# Altium PCB 10GHz_Amp.PcbDoc
Units mil, origin at the board's own origin, x right, y up, seen from the top; angles counter-clockwise.
Board outline 1732.01 x 580 mil, 2 copper layers (Top Layer, Bottom Layer), stack 22.879 mil thick; 13 components, 8 nets, 35 pads, 2 vias.
Unrouted connection lines stored in the file: 25.
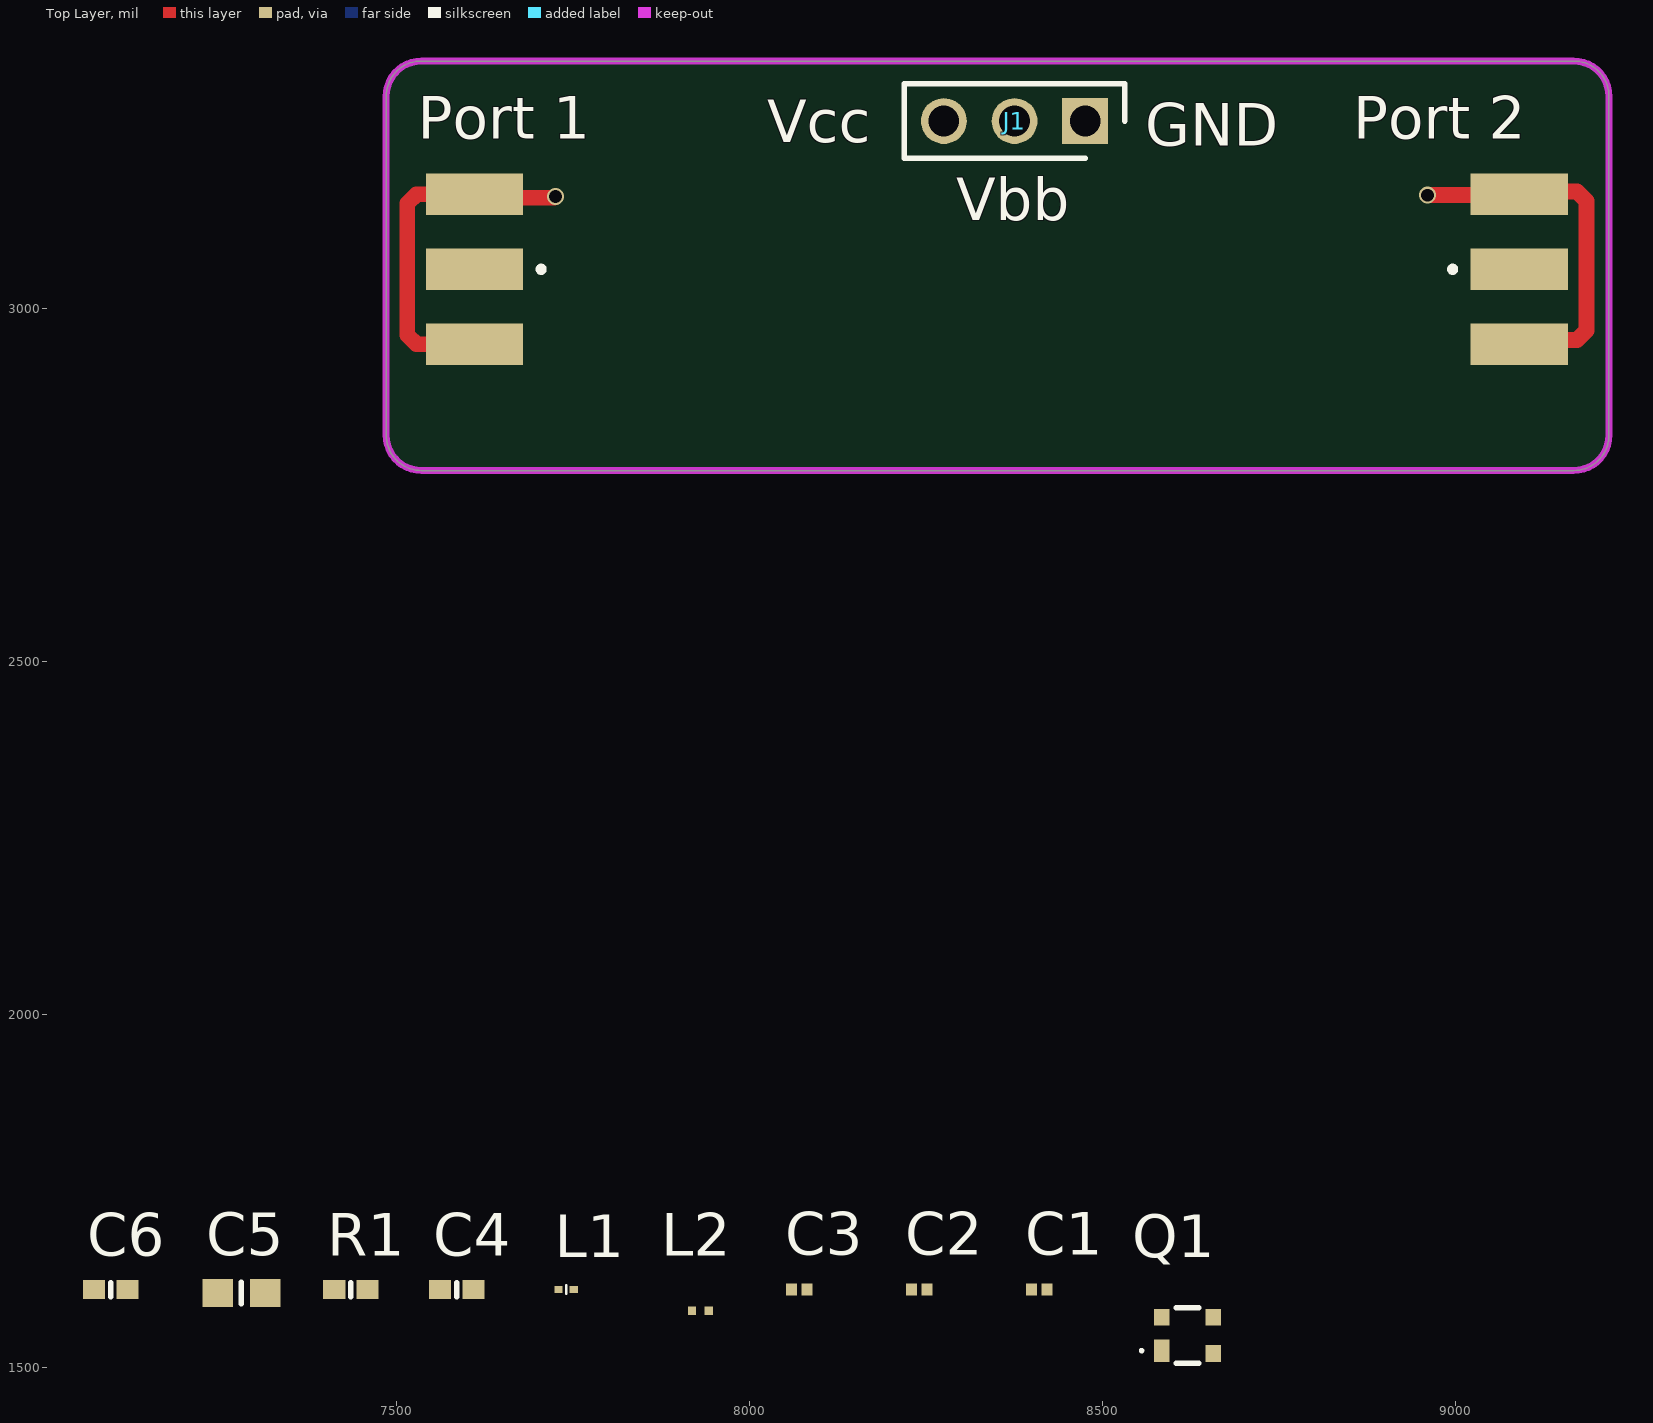
[diagram p0: Top Layer view]
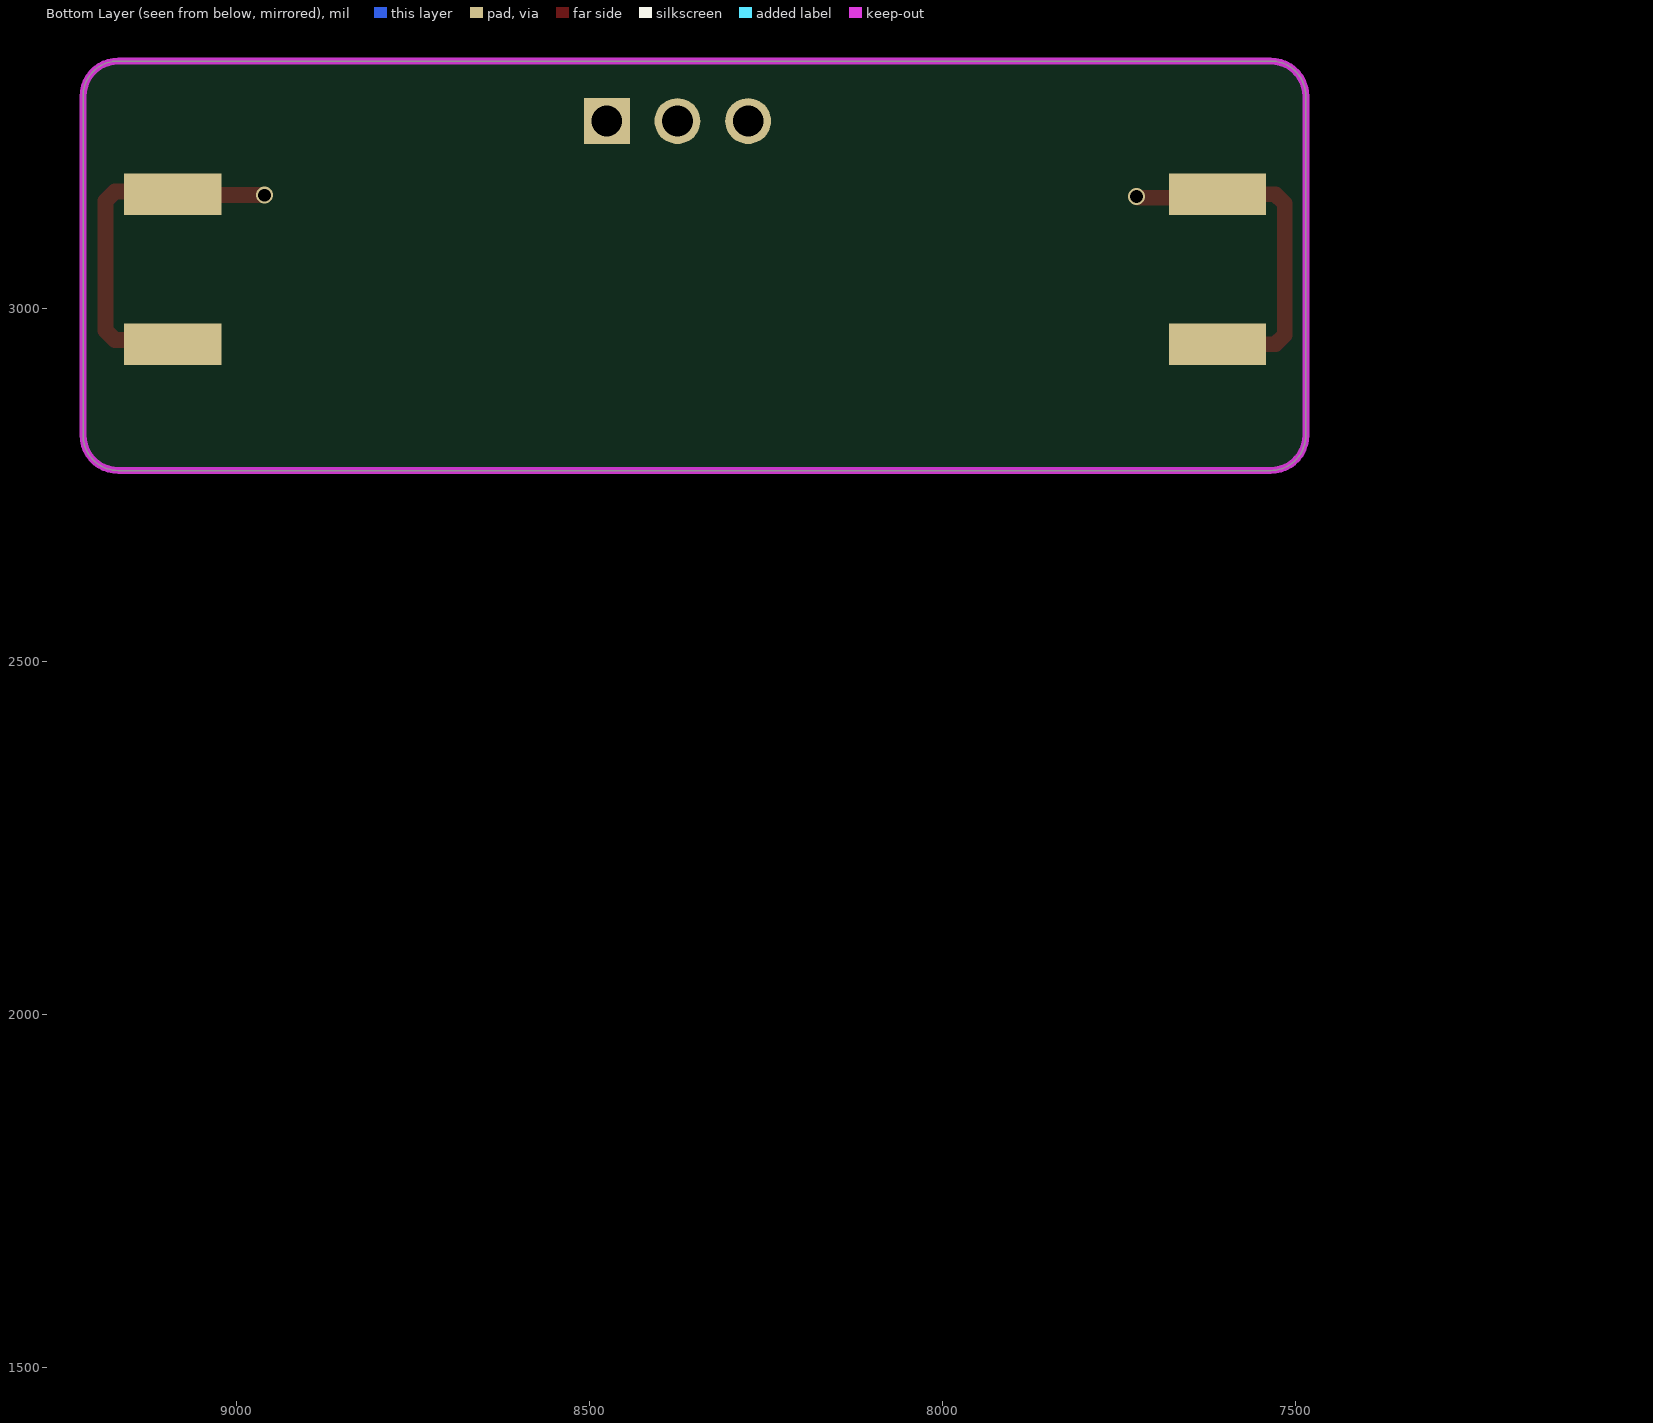
[diagram p1: Bottom Layer view, seen from below]

## Layer stack, top to bottom
Top Solder: solder mask 0.4, Solder Resist, Dk 3.5
Top Layer: signal copper 1.4
Dielectric 1: core 20.0787, Rogers 4350B, Dk 3.48
Bottom Layer: signal copper 1.4
Bottom Solder: solder mask 0.4, Solder Resist, Dk 3.5

## Board outline
7485,2820 7485,3300 cw(c7535,3300) 7535,3350 9167.01,3350 cw(c9167.01,3300) 9217.01,3300 9217.01,2820 cw(c9167.01,2820) 9167.01,2770 7535,2770 cw(c7535,2820)

## Design rules (kind name [scope] priority, off if disabled: settings)
BoardOutlineClearance [All] p1: gap=7.87 ignorepadtopadclearanceinfootprint=FALSE
Clearance [All] p1: gap=5 ignorepadtopadclearanceinfootprint=TRUE except(9.84: Arc-Hole Track-Hole SMDPad-Hole THPad-Hole Via-Hole Fill-Hole Poly-Hole Region-Hole Text-Hole)
ComponentClearance [All] p1: gap=5 collisioncheckmode=3 verticalgap=5 showdistances=TRUE
DiffPairsRouting [All] p1: maxlimit=10 minlimit=5 mostfreqgap=5 toplayer_minwidth=5 toplayer_maxwidth=1000 toplayer_prefwidth=5 bottomlayer_minwidth=5 bottomlayer_maxwidth=1000 bottomlayer_prefwidth=5 maxuncoupledlength=500
Height [All] p1: minheight=0 maxheight=71497.94 prefheight=500
HoleSize [All] p1: absolutevalues=TRUE maxlimit=248.03 minlimit=11.81 maxpercent=80.000 minpercent=20.000
HoleToHoleClearance [All] p1: gap=9.84 allowstackedmicrovias=FALSE
MinimumAnnularRing [All] p1: minimumring=3
MinimumSolderMaskSliver [All] p1: minsoldermaskwidth=0
PlaneClearance [All] p1: clearance=5
PlaneConnect PlaneConnectPowerPads [InPadClass('PowerPads')] p1: planeconnectstyle=Direct reliefexpansion=20 reliefentries=4 reliefconductorwidth=10 reliefairgap=10
PlaneConnect [All] p2: pad.planeconnectstyle=Relief pad.reliefexpansion=11.81 pad.reliefentries=4 pad.reliefconductorwidth=5 pad.reliefairgap=5 via.planeconnectstyle=Direct via.reliefexpansion=11.81 via.reliefentries=4 via.reliefconductorwidth=5 via.reliefairgap=5
PolygonConnect PolygonConnectPowerPads [All vs (InPadClass('PowerPads'))] p1: connectstyle=Direct reliefconductorwidth=10 reliefentries=4 polygonreliefangle="90 Angle" airgapwidth=10
PolygonConnect [All] p2: thpad.connectstyle=Relief thpad.reliefconductorwidth=5 thpad.reliefentries=4 thpad.polygonreliefangle="90 Angle" thpad.airgapwidth=5 smdpad.connectstyle=Relief smdpad.reliefconductorwidth=5 smdpad.reliefentries=4 smdpad.polygonreliefangle="90 Angle" smdpad.airgapwidth=5 via.connectstyle=Direct via.reliefconductorwidth=5 via.reliefentries=4 via.polygonreliefangle="90 Angle" via.airgapwidth=5
RoutingVias [All] p1: holewidth=11.81 width=23.62 viastyle="Through Hole" minholewidth=11.81 minwidth=23.62 maxholewidth=23.62 maxwidth=259.84
SilkToSilkClearance [All] p1: silktosilkclearance=0
SilkToSolderMaskClearance [IsPad] p1: minsilkscreentomaskgap=5 clearancetoexposedcopper=TRUE
SolderMaskExpansion [All] p1: expansion=2.95 istentingtop=FALSE
Width Coplanar [All] p1: maxlimit=22.38 minlimit=10 preferedwidth=22.38 impedanceprofiledriven=TRUE impedanceprofileid={8A0992C2-4B9C-4DA1-B758-8CA21724215C} impedanceprofilevalue=50.000000 minimp=50.000000 maximp=50.000000 favimp=50.000000
Width [All] p2: maxlimit=1000 minlimit=5 preferedwidth=5 minimp=50.000000 maximp=50.000000 favimp=50.000000
20 further rules are at their usual default settings.

## Components (designator, comment, footprint, x,y, rotation, side; value= is the part's Value field where it differs from the comment)
C1 "GCQ0335C1HR60WB01D" CAPC0603X33N 8410,1610 r0 top value=0.6pF
C2 "GCQ0335C1HR30WB01D" CAPC0603X33N 8240,1610 r0 top value=0.3pF
C3 "GCQ0335C1HR40WB01D" CAPC0603X33N 8070,1610 r0 top value=0.4pF
C4 "GCQ0335C1HR60WB01D" 0402 7585,1610 r0 top value=1nF
C5 "GCQ0335C1HR60WB01D" 0603 7280,1605 r0 top value=100pF
C6 "GCQ0335C1HR60WB01D" 0402 7095,1610 r0 top value=100pF
J1 "61300311121" HDRV3W64P0X254_1X3_762X254X869P 8475,3265 r180 top
L1 "LQP03TN0N6B02D" LQP03TG3N1B02D 7740,1610 r0 top value=0.6nH
L2 "LQP03HQ0N5W02D" LQP03HQ0N5B02D 7935,1580 r0 top
"Port 1" "CON-SMA-EDGE-S" RFSOLUTIONS_CON-SMA-EDGE-S 7610,3055 r0 top (schematic designator J2)
"Port 2" "CON-SMA-EDGE-S" RFSOLUTIONS_CON-SMA-EDGE-S 9090,3055 r180 top (schematic designator J3)
Q1 "BFU710F,115" BFU710F115 8620,1545 r0 top
R1 "Resistor" 0402 7435,1610 r0 top value=10

## Footprints (in the part's own frame and the unit in brackets; to place one, negate y for a bottom-side part, rotate by r counter-clockwise, add the part's x,y. Pads: shape width x height; smd on the part's side, far side on the other; paste and mask are expansions set on the pad)
0402 [mm] "Body 1.0 x 0.5 mm (LxW typ)"
  rect 0.8x0.7 smd: 1(-0.6,0) 2(0.6,0)
  silkscreen extent 0,-0.25 0,0.25, body extent -0.5,-0.25 0.5,0.25, height 0.35
0603 [mm] "Body 1.6 x 0.8 mm (LxW typ)"
  rect 1.1x1 smd: 1(-0.85,0) 2(0.85,0)
  silkscreen extent 0,-0.38 0,0.38, body extent -0.8,-0.4 0.8,0.4, height 0.5
BFU710F115 [mm]
  rect 0.55x0.8 smd: 1(-0.925,-0.55)
  rect 0.55x0.6 smd: 2(-0.925,0.65) 3(0.925,0.65) 4(0.925,-0.65)
  silkscreen extent -1.7,-1 0.4,1
CAPC0603X33N [mm]
  rect 0.4x0.42 smd: 1(-0.28,0) 2(0.28,0)
  body extent -0.3,-0.15 0.3,0.15, height 0.33
HDRV3W64P0X254_1X3_762X254X869P [mm]
  rect 1.65x1.65 hole 1.1: 1(0,0)
  round 1.65 hole 1.1: 2(2.54,0) 3(5.08,0)
  silkscreen extent -1.42,-1.35 6.5,1.35, body extent -1.27,-1.27 6.35,1.27, height 8.69
LQP03HQ0N5B02D [mm]
  rect 0.3x0.3 smd: 1(-0.427,0) 2(0.173,0)
  body extent -0.43,-0.15 0.17,0.15, height 0.42
LQP03TG3N1B02D [mm]
  rect 0.3x0.25 smd: 1(-0.275,0) 2(0.275,0)
  silkscreen extent 0,-0.15 0,0.15, body extent -0.3,-0.15 0.3,0.15, height 0.33
RFSOLUTIONS_CON-SMA-EDGE-S [mm]
  rect 3.5x1.5 smd: 1(0,0) G1(0,2.7) G2(0,-2.7)
  rect 3.5x1.5 smd far side: G3(0,2.7) G4(0,-2.7)
  silkscreen extent 2.3,-0.1 2.5,0.1, body extent -11.27,-3.17 2.06,3.17, height 3.55

## Part data
C1 C2 C3: library part "Capacitor 0201 (0603M)", "Ceramic Capacitor X5R 0201 (0603 Metric)", Package="0603 AVX", Availability="In Stock", Check_prices=https://www.snapeda.com/parts/0201ZD104KAT2A/AVX/view-part/?ref=eda, MF=AVX, MP=0201ZD104KAT2A, Price=None, Purchase-URL=https://pricing.snapeda.com/search/part/0201ZD104KAT2A/?ref=eda, SnapEDA_Link=https://www.snapeda.com/parts/0201ZD104KAT2A/AVX/view-part/?ref=snap
C4 C5 C6: library part "Capacitor Ceramic"
J1: "Connector", Manufacturer_Name="Wurth Elektronik", Mouser Part Number=710-61300311121, Datasheet Link=http://katalog.we-online.de/em/datasheet/6130xx11121.pdf, Height=8.69mm, Manufacturer_Part_Number=61300311121, Mouser Price/Stock=https://www.mouser.co.uk/ProductDetail/Wurth-Elektronik/61300311121?qs=PhR8RmCirEYxRWFJzNKsUw%3D%3D
L1: "Inductor", Manufacturer_Name="Murata Electronics", Mouser Part Number=81-LQP03TN0N6B02D, Datasheet Link=https://search.murata.co.jp/Ceramy/image/img/P02/JELF243C-0015.pdf, Height=0.33mm, Manufacturer_Part_Number=LQP03TN0N6B02D, Mouser Price/Stock=https://www.mouser.com/Search/Refine.aspx?Keyword=81-LQP03TN0N6B02D
L2: "Inductor", Manufacturer_Name="Murata Electronics", Mouser Part Number=81-LQP03HQ0N5W02D, Datasheet Link=https://search.murata.co.jp/Ceramy/image/img/P02/JELF243C-0021.pdf, Height=0.42mm, Manufacturer_Part_Number=LQP03HQ0N5W02D, Mouser Price/Stock=https://www.mouser.co.uk/ProductDetail/Murata-Electronics/LQP03HQ0N5W02D?qs=xZ%2FP%252Ba9zWqaDUf%2FupWIkIQ%3D%3D
"Port 1" "Port 2": "SMA Connector Jack, Female Socket - Board Edge, End Launch Solder", Package=None, Check_prices=https://www.snapeda.com/parts/CON-SMA-EDGE-S/RF+Solutions/view-part/?ref=eda, Digi-Key_Part_Number=CON-SMA-EDGE-S-ND, MF="RF Solutions", MP=CON-SMA-EDGE-S, Purchase-URL=https://pricing.snapeda.com/search/part/CON-SMA-EDGE-S/?ref=eda, SnapEDA_Link=https://www.snapeda.com/parts/CON-SMA-EDGE-S/RF+Solutions/view-part/?ref=snap
Q1: "Transistor BJT NPN", Manufacturer_Name=NXP, Mouser Part Number=771-BFU710F115, Datasheet Link=http://www.nxp.com/docs/en/data-sheet/BFU710F.pdf, Height=0.75mm, Manufacturer_Part_Number=BFU710F,115, Mouser Price/Stock=https://www.mouser.com/Search/Refine.aspx?Keyword=771-BFU710F115
R1: "Resistive element"

## Via types
v1: diameter 24, hole 18, Top Layer to Bottom Layer, 2 vias

## Nets (pads, with @x,y where several pads share a name; then routed paths per layer and width w, separated by ;. In a path a pad name is that pad's centre, name@x,y a point inside that pad or via, vN(x,y) a via of type N, cw(c..) or ccw(c..) an arc to the next point about the centre after c; other vN are vias at no path point)
GND: "Port 1.G1" "Port 1.G2" "Port 1.G3" "Port 1.G4" "Port 2.G1" "Port 2.G2" "Port 2.G3" "Port 2.G4" C3.2 C4.1 C5.1 C6.1 J1.1 L1.2 Q1.1 Q1.3 | length 1022.3
  Top Layer w22.38: 7610,2948.7 7528.11,2948.7 7515,2961.81 7515,3148.19 7528.11,3161.3 7610,3161.3 ; 7610,3156.3 7722.86,3156.3 7724.56,3158 v1(7725,3158) ; v1(8960,3160) 8960.31,3160.31 9089.01,3160.31 9090,3161.3 9093.7,3165 9171.89,3165 9185,3151.89 9185,2968.11 9171.89,2955 9096.3,2955 9090,2948.7
NetC1_1: "Port 2.1" C1.1 L1.1
NetC1_2: C1.2 C3.1 Q1.2 R1.2
NetC2_1: C2.1 L2.1 Q1.4
NetC2_2: "Port 1.1" C2.2
NetC6_2: C6.2 R1.1
Vbb: J1.2
Vcc: C4.2 C5.2 J1.3 L2.2

## Keep-outs
Keep-Out Layer:
  the board outline again, w10

## Silkscreen, mask and mechanical layers (free items; w line width, h text height)
Top Overlay:
  text "Vcc" at 8025,3235 h60
  text "GND" at 8560,3230 h60
  text "Vbb" at 8292.21,3124.79 h60